# Altium PCB linkit-v4-0.3_6layers.PcbDoc (part 6 of 6)
Units mm, origin at the board's own origin, x right, y up, seen from the top; angles counter-clockwise.
Board outline 70 x 35 mm, 6 copper layers (Top Layer, Int1 (GND), Int2 (Sign), Int3 (Sign), Int4 (PWR), Bottom Layer), stack 1.551 mm thick; 185 components, 156 nets, 761 pads, 1071 vias.
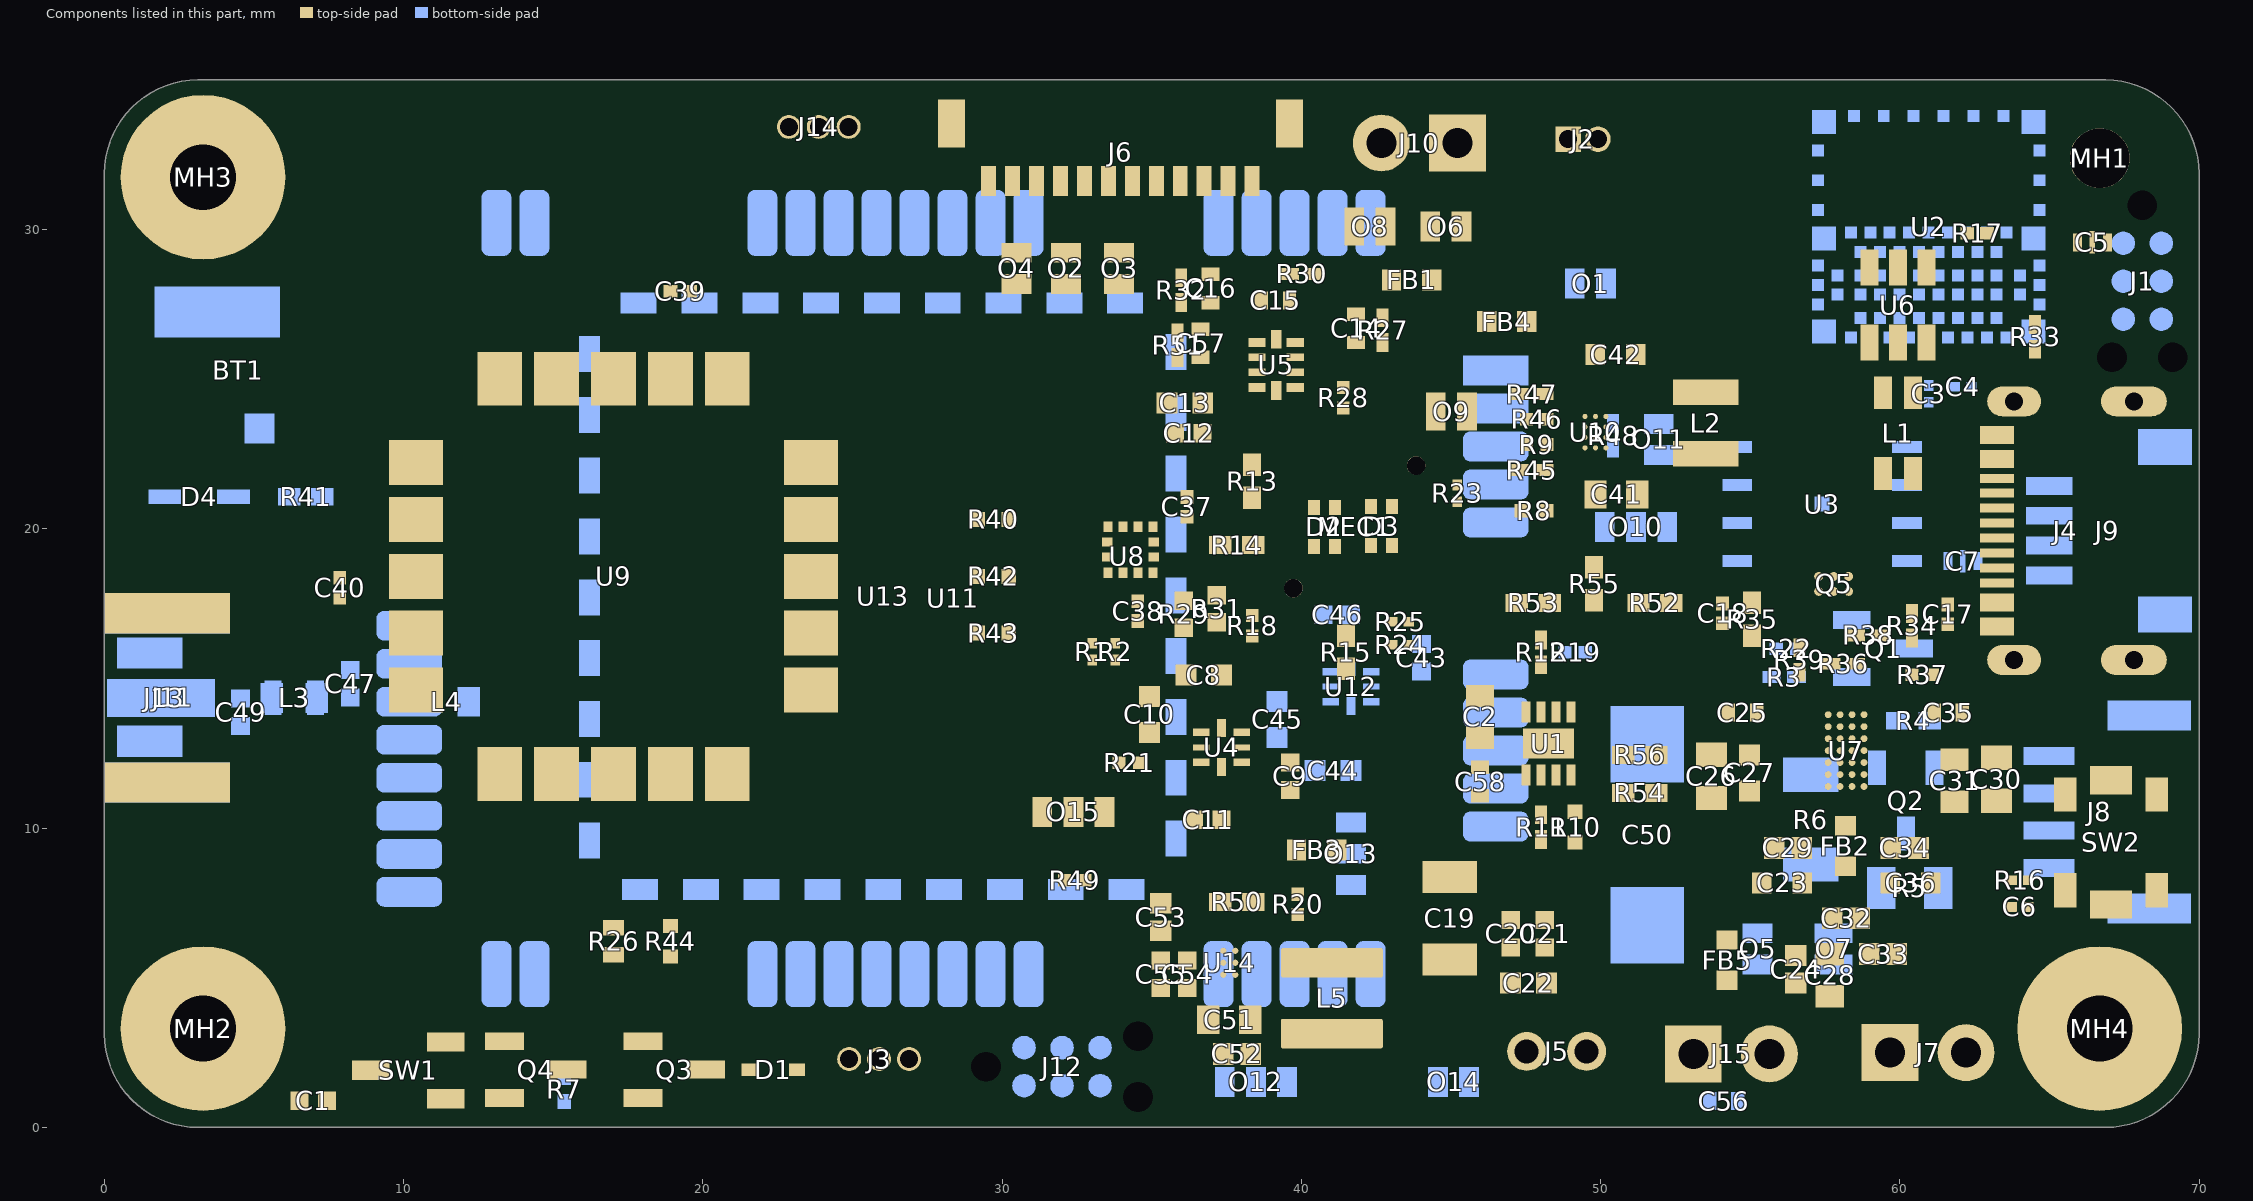
[diagram p9: the components of this part, seen from the top]

## Silkscreen, mask and mechanical layers (free items; w line width, h text height) (continued)
Drill Drawing:
  circle w0.254: c114.294,89.584 r0.414
  circle w0.254: c114.294,89.584 r0.691
  circle w0.254: c114.294,70.936 r0.691
  lines w0.254: 113.604,55.396 114.294,54.705 114.985,55.396 114.294,56.086 113.604,55.396 ; 113.604,57.813 114.985,57.813 114.985,59.194 113.604,59.194 113.604,57.813 ; 113.604,60.921 114.294,61.267 114.985,60.921 114.64,61.612 114.985,62.303 114.294,61.957 113.604,62.303 113.949,61.612 113.604,60.921 ; 113.604,64.375 113.949,64.375 114.294,64.029 114.64,64.375 114.985,64.375 114.64,64.72 114.985,65.065 114.64,65.065 114.294,65.411 113.949,65.065 113.604,65.065 113.949,64.72 113.604,64.375 ; 113.604,67.137 114.985,67.137 114.985,68.519 113.604,68.519 113.604,67.137 ; 113.604,73.699 113.949,73.699 114.294,73.353 114.64,73.699 114.985,73.699 114.64,74.044 114.985,74.389 114.64,74.389 114.294,74.735 113.949,74.389 113.604,74.389 113.949,74.044 113.604,73.699 ; 113.604,76.462 113.604,76.807 113.949,77.152 113.604,77.498 113.604,77.843 113.949,77.843 114.294,77.498 114.64,77.843 114.985,77.843 114.985,77.498 114.64,77.152 114.985,76.807 114.985,76.462 114.64,76.462 114.294,76.807 113.949,76.462 113.604,76.462 ; 113.604,80.951 114.985,80.951 114.294,79.57 113.604,80.951 ; 113.604,83.023 113.949,83.023 113.949,82.678 114.64,82.678 114.64,83.023 114.985,83.023 114.985,83.714 114.64,83.714 114.64,84.059 113.949,84.059 113.949,83.714 113.604,83.714 113.604,83.023 ; 113.604,85.786 114.294,86.131 114.985,85.786 114.64,86.476 114.985,87.167 114.294,86.822 113.604,87.167 113.949,86.476 113.604,85.786 ; 113.88,58.089 114.709,58.089 114.709,58.918 113.88,58.918 113.88,58.089 ; 113.88,61.197 114.294,61.405 114.709,61.197 114.502,61.612 114.709,62.026 114.294,61.819 113.88,62.026 114.087,61.612 113.88,61.197 ; 113.88,73.837 114.087,73.837 114.294,73.63 114.502,73.837 114.709,73.837 114.502,74.044 114.709,74.251 114.502,74.251 114.294,74.459 114.087,74.251 113.88,74.251 114.087,74.044 113.88,73.837
  lines w0.381: 112.35,91.069 253.459,91.069 ; 119.404,53.773 119.404,94.177 ; 124.728,53.773 124.728,94.177 ; 136.281,53.773 136.281,94.177 ; 141.699,53.773 141.699,94.177 ; 149.436,53.773 149.436,94.177 ; 163.771,53.773 163.771,94.177 ; 170.167,53.773 170.167,94.177 ; 178.419,53.773 178.419,94.177 ; 194.294,53.773 194.294,94.177 ; 202.587,53.773 202.587,94.177 ; 215.267,53.773 215.267,94.177 ; 227.614,53.773 227.614,94.177 ; 239.083,53.773 239.083,94.177 ; 112.35,53.773 253.459,53.773 253.459,94.177 112.35,94.177 112.35,53.773
  text "Symbol" at 114.215,92.002 h1.83
  text "Count" at 120.336,92.002 h1.83
  text "Hole Size" at 125.66,92.002 h1.83
  text "Plated" at 137.213,92.002 h1.83
  text "Hole Type" at 142.631,92.002 h1.83
  text "Drill Layer Pair" at 150.368,92.002 h1.83
  text "Via/Pad" at 164.703,92.002 h1.83
  text "Pad Shape" at 171.099,92.002 h1.83
  text "Template" at 179.351,92.002 h1.83
  text "Description" at 195.226,92.002 h1.83
  text "Hole Tolerance (+)" at 203.52,92.002 h1.83
  text "Hole Tolerance (-)" at 216.199,92.002 h1.83
  text "Hole Length" at 228.546,92.002 h1.83
  text "Routed Path Length" at 240.015,92.002 h1.83
  text "1" at 120.336,88.894 h1.52
  text "2,000mm (78,74mil)" at 125.66,88.894 h1.52
  text "NPTH" at 137.213,88.894 h1.52
  text "Round" at 142.631,88.894 h1.52
  text "Top Layer - Bottom Layer" at 150.368,88.894 h1.52
  text "Pad" at 164.703,88.894 h1.52
  text "Rounded" at 171.099,88.894 h1.52
  text "c200hn200m200" at 179.351,88.894 h1.52
  text "-" at 228.546,88.894 h1.52
  text "-" at 240.015,88.894 h1.52
  text "2" at 120.336,85.786 h1.52
  text "0,600mm (23,62mil)" at 125.66,85.786 h1.52
  text "PTH" at 137.213,85.786 h1.52
  text "Slot" at 142.631,85.786 h1.52
  text "Top Layer - Bottom Layer" at 150.368,85.786 h1.52
  text "Pad" at 164.703,85.786 h1.52
  text "Rounded" at 171.099,85.786 h1.52
  text "r180_100h60_140r50m0mx0" at 179.351,85.786 h1.52
  text "1,400mm (55,12mil)" at 228.546,85.786 h1.52
  text "0,800mm (31,50mil)" at 240.015,85.786 h1.52
  text "2" at 120.336,82.678 h1.52
  text "0,600mm (23,62mil)" at 125.66,82.678 h1.52
  text "PTH" at 137.213,82.678 h1.52
  text "Slot" at 142.631,82.678 h1.52
  text "Top Layer - Bottom Layer" at 150.368,82.678 h1.52
  text "Pad" at 164.703,82.678 h1.52
  text "Rounded" at 171.099,82.678 h1.52
  text "r220_100h60_180r50m0mx0" at 179.351,82.678 h1.52
  text "1,800mm (70,87mil)" at 228.546,82.678 h1.52
  text "1,200mm (47,24mil)" at 240.015,82.678 h1.52
  text "2" at 120.336,79.57 h1.52
  text "0,620mm (24,41mil)" at 125.66,79.57 h1.52
  text "NPTH" at 137.213,79.57 h1.52
  text "Round" at 142.631,79.57 h1.52
  text "Top Layer - Bottom Layer" at 150.368,79.57 h1.52
  text "Pad" at 164.703,79.57 h1.52
  text "Rounded" at 171.099,79.57 h1.52
  text "c62hn62m42p0" at 179.351,79.57 h1.52
  text "-" at 228.546,79.57 h1.52
  text "-" at 240.015,79.57 h1.52
  text "2" at 120.336,76.462 h1.52
  text "0,800mm (31,50mil)" at 125.66,76.462 h1.52
  text "PTH" at 137.213,76.462 h1.52
  text "Round" at 142.631,76.462 h1.52
  text "Top Layer - Bottom Layer" at 150.368,76.462 h1.52
  text "Pad" at 164.703,76.462 h1.52
  text "Rounded" at 171.099,76.462 h1.52
  text "c130h80m0mx0" at 179.351,76.462 h1.52
  text "-" at 228.546,76.462 h1.52
  text "-" at 240.015,76.462 h1.52
  text "3" at 120.336,73.353 h1.52
  text "2,200mm (86,61mil)" at 125.66,73.353 h1.52
  text "PTH" at 137.213,73.353 h1.52
  text "Round" at 142.631,73.353 h1.52
  text "Top Layer - Bottom Layer" at 150.368,73.353 h1.52
  text "Pad" at 164.703,73.353 h1.52
  text "Rounded" at 171.099,73.353 h1.52
  text "c550h220m0mx0" at 179.351,73.353 h1.52
  text "-" at 228.546,73.353 h1.52
  text "-" at 240.015,73.353 h1.52
  text "6" at 120.336,70.245 h1.52
  text "0,300mm (11,81mil)" at 125.66,70.245 h1.52
  text "PTH" at 137.213,70.245 h1.52
  text "Round" at 142.631,70.245 h1.52
  text "Top Layer - Bottom Layer" at 150.368,70.245 h1.52
  text "Via" at 164.703,70.245 h1.52
  text "Rounded" at 171.099,70.245 h1.52
  text "v60h30m0mx0" at 179.351,70.245 h1.52
  text "-" at 228.546,70.245 h1.52
  text "-" at 240.015,70.245 h1.52
  text "6" at 120.336,67.137 h1.52
  text "0,991mm (39,02mil)" at 125.66,67.137 h1.52
  text "NPTH" at 137.213,67.137 h1.52
  text "Round" at 142.631,67.137 h1.52
  text "Top Layer - Bottom Layer" at 150.368,67.137 h1.52
  text "Pad" at 164.703,67.137 h1.52
  text "Rounded" at 171.099,67.137 h1.52
  text "c65hn99m0mx0" at 179.351,67.137 h1.52
  text "-" at 228.546,67.137 h1.52
  text "-" at 240.015,67.137 h1.52
  text "6" at 120.336,64.029 h1.52
  text "1,000mm (39,37mil)" at 125.66,64.029 h1.52
  text "PTH" at 137.213,64.029 h1.52
  text "Round" at 142.631,64.029 h1.52
  text "Top Layer - Bottom Layer" at 150.368,64.029 h1.52
  text "Pad" at 164.703,64.029 h1.52
  text "(Mixed)" at 171.099,64.029 h1.52
  text "(Mixed)" at 179.351,64.029 h1.52
  text "-" at 228.546,64.029 h1.52
  text "-" at 240.015,64.029 h1.52
  text "7" at 120.336,60.921 h1.52
  text "0,100mm (3,94mil)" at 125.66,60.921 h1.52
  text "PTH" at 137.213,60.921 h1.52
  text "Round" at 142.631,60.921 h1.52
  text "Top Layer - Bottom Layer" at 150.368,60.921 h1.52
  text "Via" at 164.703,60.921 h1.52
  text "Rounded" at 171.099,60.921 h1.52
  text "v25h10m0mx0" at 179.351,60.921 h1.52
  text "-" at 228.546,60.921 h1.52
  text "-" at 240.015,60.921 h1.52
  text "8" at 120.336,57.813 h1.52
  text "0,600mm (23,62mil)" at 125.66,57.813 h1.52
  text "PTH" at 137.213,57.813 h1.52
  text "Round" at 142.631,57.813 h1.52
  text "Top Layer - Bottom Layer" at 150.368,57.813 h1.52
  text "Pad" at 164.703,57.813 h1.52
  text "(Mixed)" at 171.099,57.813 h1.52
  text "(Mixed)" at 179.351,57.813 h1.52
  text "-" at 228.546,57.813 h1.52
  text "-" at 240.015,57.813 h1.52
  text "50" at 120.336,54.705 h1.52
  text "0,200mm (7,87mil)" at 125.66,54.705 h1.52
  text "PTH" at 137.213,54.705 h1.52
  text "Round" at 142.631,54.705 h1.52
  text "Top Layer - Bottom Layer" at 150.368,54.705 h1.52
  text "Via" at 164.703,54.705 h1.52
  text "Rounded" at 171.099,54.705 h1.52
  text "(Mixed)" at 179.351,54.705 h1.52
  text "-" at 228.546,54.705 h1.52
  text "-" at 240.015,54.705 h1.52
  text "Slot definitions :" at 114.215,52.529 h1.52
  text "Routed Path Length" at 122.776,52.529 h1.52
  text "= Calculated from tool start centre position to tool end centre position." at 133.341,52.529 h1.52
  text "Hole Length" at 122.776,51.286 h1.52
  text "= Routed Path Length + Tool Size = Slot length as defined in the PCB layout" at 129.485,51.286 h1.52

## Text inside footprints (layer, text, board x,y; h text height)
J13: Mechanical 10 "Edge of PCB" at -0.825,12.351 h0.8 r270
U11: Mechanical 3 "Bottom KIM2  / Peelable soldermask to all components below KIM2" at 44.894,24.824 h0.8